# Altium PCB 2020-EE-16 EEW Assignment-8 Rev-1.PcbDoc
Units mm, origin at the board's own origin, x right, y up, seen from the top; angles counter-clockwise.
Board outline 152.4 x 101.6 mm, 2 copper layers (Top Layer, Bottom Layer); 50 components, 37 nets, 154 pads, 26 vias.
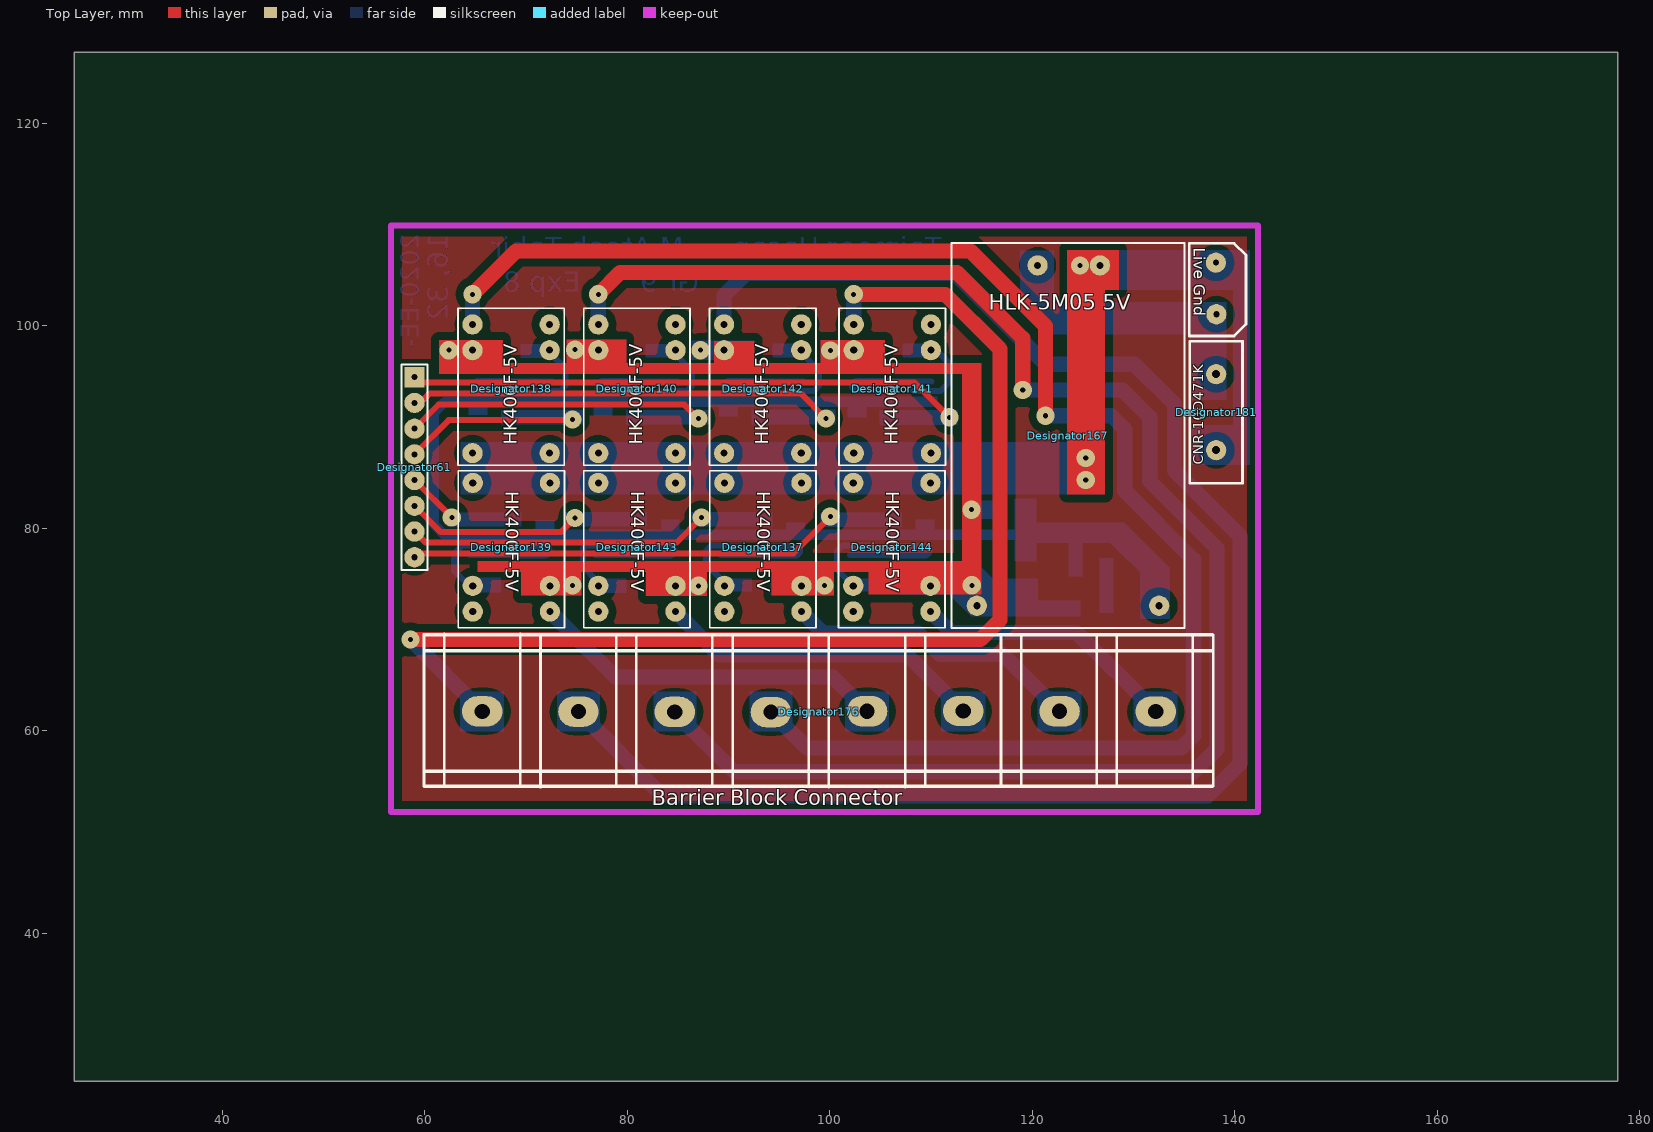
[diagram p0: Top Layer view]
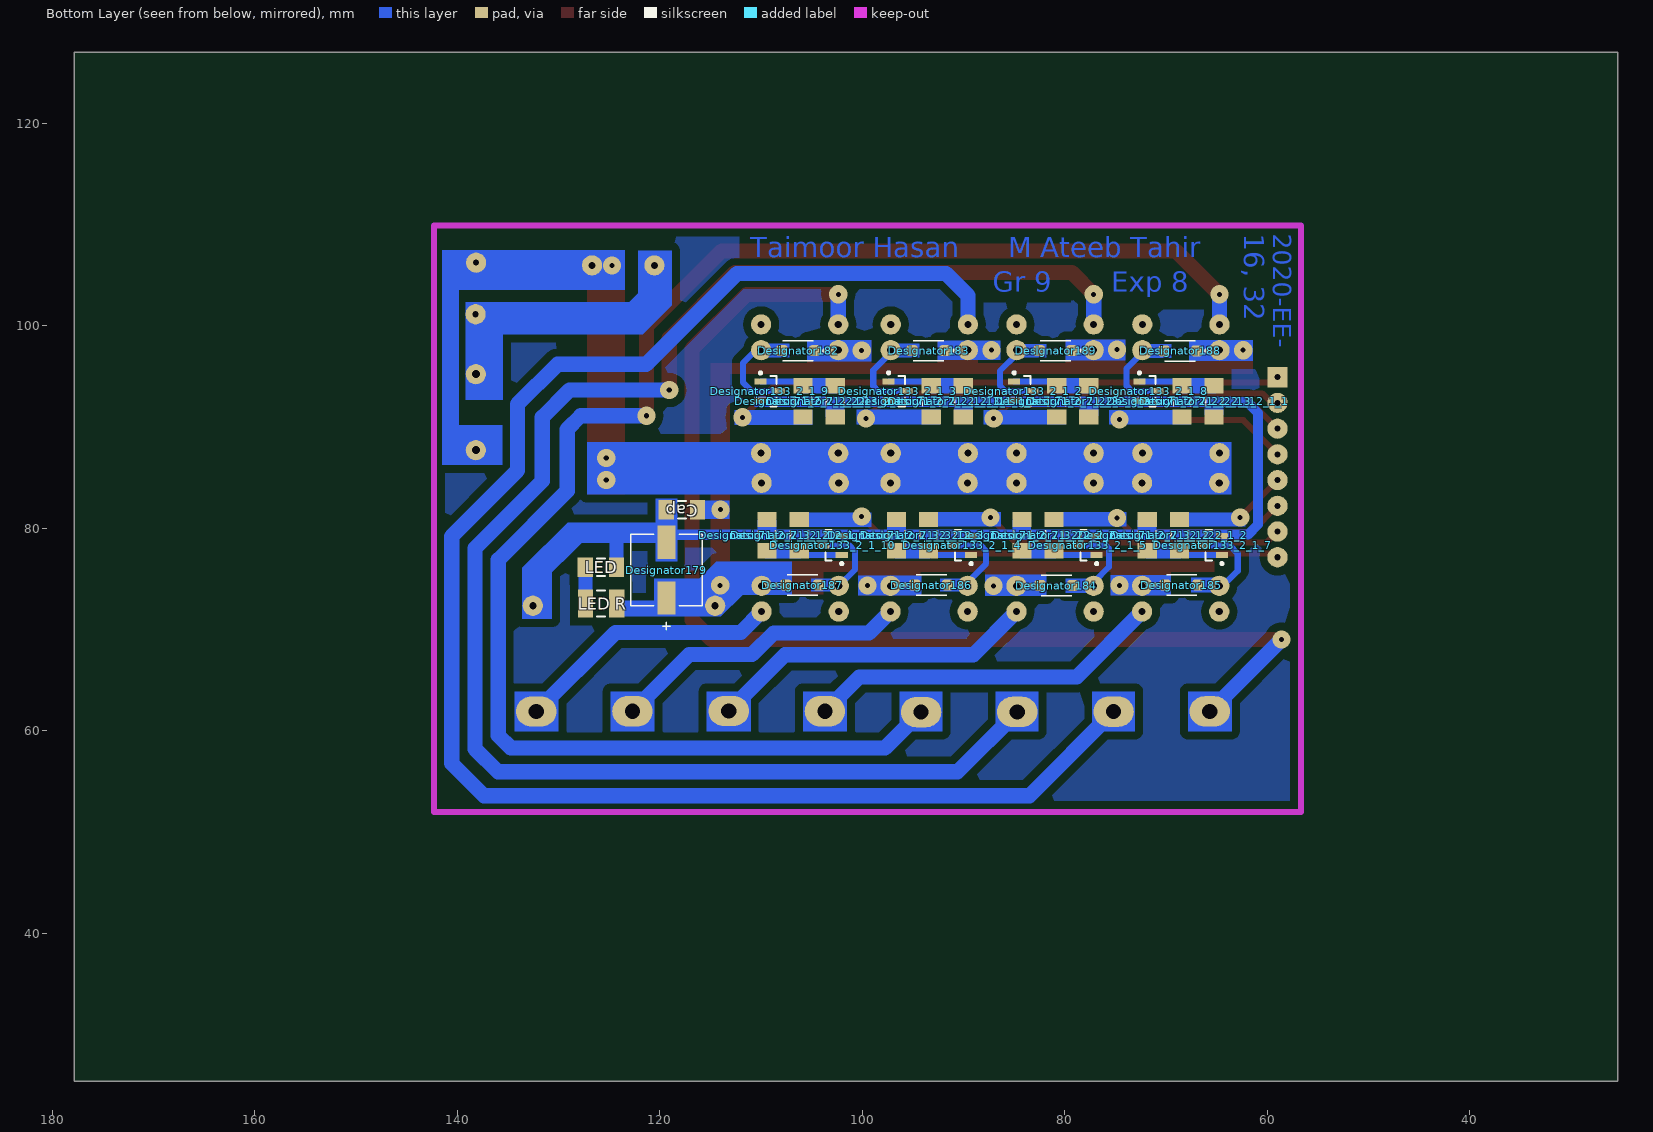
[diagram p1: Bottom Layer view, seen from below]

## Layer stack, top to bottom
Top Layer: signal copper 0.0356
Dielectric: dielectric 0.32, FR-4, Dk 4.8
Bottom Layer: signal copper 0.0356

## Board outline
25.4,25.4 177.8,25.4 177.8,127 25.4,127

## Design rules (kind name [scope] priority, off if disabled: settings)
Clearance [All] p1: gap=0.254
PolygonConnect [All] p1: connectstyle=Relief reliefconductorwidth=0.254 reliefentries=4 polygonreliefangle="90 Angle"
RoutingVias [All] p1: holewidth=0.711 width=1.27 viastyle="Through Hole" minholewidth=0.711 minwidth=1.27 maxholewidth=0.711 maxwidth=1.27
SilkscreenOverComponentPads [All] p1: minsilkscreentomaskgap=0.254
SolderMaskExpansion [All] p1: expansion=0.102
Width [All] p1: maxlimit=1.5 minlimit=0.6 preferedwidth=1.5 minimp=50.000000 maximp=50.000000 favimp=50.000000
27 further rules are at their usual default settings.

## Components (designator, comment, footprint, x,y, rotation, side; value= is the part's Value field where it differs from the comment)
Cap "Comment" RESC3216M 117.805,81.839 r0 bottom
Designator61 "Comment" HDR1X8 58.992,94.92 r270 top
Designator71_2_2_2_1_1 "Comment" RESC3216M 106.223,79.324 r270 bottom
Designator71_2_2_2_1_1_1 "Comment" RESC3216M 93.193,92.532 r90 bottom
Designator71_2_2_2_1_2 "Comment" RESC3216M 68.682,79.324 r270 bottom
Designator71_2_2_2_2 "Comment" RESC3216M 81.051,79.324 r270 bottom
Designator71_2_2_2_2_1 "Comment" RESC3216M 105.842,92.532 r270 bottom
Designator71_2_2_2_2_1_1 "Comment" RESC3216M 68.428,92.532 r90 bottom
Designator71_2_2_2_3 "Comment" RESC3216M 80.797,92.532 r90 bottom
Designator71_2_2_2_3_1 "Comment" RESC3216M 93.447,79.324 r270 bottom
Designator71_2_2_3_1_1 "Comment" RESC3216M 109.398,79.324 r270 bottom
Designator71_2_2_3_1_1_1 "Comment" RESC3216M 90.018,92.532 r90 bottom
Designator71_2_2_3_1_2 "Comment" RESC3216M 71.857,79.324 r270 bottom
Designator71_2_2_3_2 "Comment" RESC3216M 84.226,79.324 r270 bottom
Designator71_2_2_3_2_1 "Comment" RESC3216M 102.667,92.532 r270 bottom
Designator71_2_2_3_2_1_1 "Comment" RESC3216M 65.253,92.532 r90 bottom
Designator71_2_2_3_3 "Comment" RESC3216M 77.622,92.532 r90 bottom
Designator71_2_2_3_3_1 "Comment" RESC3216M 96.622,79.324 r270 bottom
Designator133_2_1_2 "Comment" SOT23-3L 84.099,93.548 r180 bottom
Designator133_2_1_3 "Comment" SOT23-3L 96.495,93.548 r180 bottom
Designator133_2_1_4 "Comment" SOT23-3L 90.145,78.308 r0 bottom
Designator133_2_1_5 "Comment" SOT23-3L 77.749,78.308 r0 bottom
Designator133_2_1_7 "Comment" SOT23-3L 65.38,78.308 r0 bottom
Designator133_2_1_8 "Comment" SOT23-3L 71.73,93.548 r180 bottom
Designator133_2_1_9 "Comment" SOT23-3L 109.144,93.548 r180 bottom
Designator133_2_1_10 "Comment" SOT23-3L 102.921,78.308 r0 bottom
Designator137 "Comment" "HK400F 5v Relay" 93.398,78.13 r270 top
Designator138 "Comment" "HK400F 5v Relay" 68.531,93.777 r90 top
Designator139 "Comment" "HK400F 5v Relay" 68.556,78.13 r270 top
Designator140 "Comment" "HK400F 5v Relay" 80.952,93.777 r90 top
Designator141 "Comment" "HK400F 5v Relay" 106.172,93.777 r90 top
Designator142 "Comment" "HK400F 5v Relay" 93.372,93.777 r90 top
Designator143 "Comment" "HK400F 5v Relay" 80.952,78.13 r270 top
Designator144 "Comment" "HK400F 5v Relay" 106.123,78.13 r270 top
Designator158 "Comment" "100uF silver capacitor" 64.186,94.209 r0 top
Designator167 "Comment" PCBComponent_1 123.52,89.154 r270 top locked
Designator176 "Comment" "Barrier Block Connector" 98.933,61.9 r90 top locked
Designator179 "Comment" PCAP_6.3X5.4-ELECT 119.329,75.87 r90 bottom
Designator181 "Comment" CNR-10D471K 138.151,91.465 r90 top
Designator182 "Comment" SODFL3718X108N 106.324,97.536 r0 bottom
Designator183 "Comment" SODFL3718X108N 93.472,97.536 r0 bottom
Designator184 "Comment" SODFL3718X108N 80.797,74.346 r180 bottom
Designator185 "Comment" SODFL3718X108N 68.453,74.397 r180 bottom
Designator186 "Comment" SODFL3718X108N 93.167,74.397 r180 bottom
Designator187 "Comment" SODFL3718X108N 105.893,74.397 r180 bottom
Designator188 "Comment" SODFL3718X108N 68.605,97.511 r0 bottom
Designator189 "Comment" SODFL3718X108N 80.924,97.536 r0 bottom
LED "Comment" RESC3216M 125.806,76.149 r180 bottom
"LED R" "Comment" RESC3225M 125.781,72.568 r180 bottom
"Live Gnd" "Comment" "PCB Block Connector" 138.151,103.683 r90 top

## Footprints (in the part's own frame and the unit in brackets; to place one, negate y for a bottom-side part, rotate by r counter-clockwise, add the part's x,y. Pads: shape width x height; smd on the part's side, far side on the other; paste and mask are expansions set on the pad)
"100uF silver capacitor" [mm]
  rect 2.8x0.8 smd: 1(-596.389,-761.492) 2(-601.469,-761.492)
  silkscreen extent -602.03,-764.63 -595.81,-758.33
"Barrier Block Connector" [mm] "8 pin Barrier Block Connector"
  oval 3x4 hole 1.5: 1(0.021,33.25) 2(-0.004,23.75) 3(-0.029,14.25) 4(-0.054,4.75) 5(0.033,-4.75) 6(0.054,-14.25) 7(0.029,-23.75) 8(0.004,-33.25)
  silkscreen extent -7.48,-38.92 7.67,39
CNR-10D471K [mm]
  round 2 hole 0.8: 1(-3.75,0) 2(3.75,0)
  silkscreen extent -7,-2.6 7,2.6
HDR1X8 [mm]
  rect 2x2 hole 0.6: 1(0,0)
  round 2 hole 0.6: 2(2.54,0) 3(5.08,0) 4(7.62,0) 5(10.16,0) 6(12.7,0) 7(15.24,0) 8(17.78,0)
  silkscreen extent -1.27,-1.27 19.05,1.27
"HK400F 5v Relay" [mm] "Relay"
  round 2 hole 0.7: Coil-A(3.81,3.81) Coil-B(3.81,-3.81) Comm(-6.35,3.81) Comm(-6.35,-3.81) N-C(6.35,-3.81) N-O(6.35,3.81)
  silkscreen extent -7.55,-5.25 7.95,5.25
PCAP_6.3X5.4-ELECT [mil]
  rect 130x71 smd: 1(-108.5,0) 2(108.5,0)
  silkscreen extent -232,-139 139,139
"PCB Block Connector" [mm]
  round 2 hole 0.6: 1(-2.547,-0.023) 2(2.547,0.023)
  silkscreen extent -4.7,-2.94 4.44,2.65
PCBComponent_1 [mm]
  round 2 hole 0.7: +Vo(16.8,-9) -Vo(16.8,9) "AC LIVE"(-16.8,3.156) "AC NEUTRAL"(-16.8,-3)
  silkscreen extent -19,-11.5 19,11.5
RESC3216M [mm] "Chip Resistor, Body 3.2x1.6mm, IPC Low Density"
  rect 1.5x1.9 smd: 1(-1.55,0) 2(1.55,0)
  silkscreen extent -0.4,-0.85 0.4,0.85, body extent -1.68,-0.87 1.68,0.87, height 0.71
RESC3225M [mm] "Chip Resistor, Body 3.2x2.5mm, IPC Low Density"
  rect 1.5x2.8 smd: 1(-1.55,0) 2(1.55,0)
  silkscreen extent -0.4,-1.3 0.4,1.3, body extent -1.68,-1.32 1.68,1.32, height 0.71
SODFL3718X108N [mm]
  rrect50% 1.12x1.08 smd: A(1.6,0) C(-1.645,0)
  silkscreen extent -2.72,-1 1.5,1
SOT23-3L [mm] "SOT23, 3-Leads, Body 2.9x1.3mm, Pitch 0.95mm, Lead Span 2.5mm, IPC High Density"
  rect 1.2x0.6 smd: 1(-0.9,0.95) 2(-0.9,-0.95) 3(0.9,0)
  silkscreen extent -1.02,-1.5 0.7,1.92, body extent -0.7,-1.5 0.7,1.5, height 1.1

## Via types
v1: diameter 1.8, hole 0.5, Top Layer to Bottom Layer, 26 vias

## Nets (pads, with @x,y where several pads share a name; then routed paths per layer and width w, separated by ;. In a path a pad name is that pad's centre, name@x,y a point inside that pad or via, vN(x,y) a via of type N, cw(c..) or ccw(c..) an arc to the next point about the centre after c; other vN are vias at no path point)
"1-Diode-Coil B": Designator133_2_1_9.3 Designator141.Coil-B Designator182.A | length 8.1
  Bottom Layer w0.6: Designator133_2_1_9.3 110.922,93.548 111.785,94.412 111.785,96.317 110.515,97.587 Designator141.Coil-B
"2-Diode-Coil B": Designator133_2_1_3.3 Designator142.Coil-B Designator183.A | length 7.8
  Bottom Layer w0.6: Designator133_2_1_3.3 98.4,93.548 98.908,94.056 98.908,95.606 97.182,97.331 Designator142.Coil-B
"3-Diode-Coil B": Designator133_2_1_2.3 Designator140.Coil-B Designator189.A | length 7.6
  Bottom Layer w0.6: Designator133_2_1_2.3 85.877,93.548 86.411,94.082 86.411,95.529 84.762,97.179 Designator140.Coil-B
"4-Diode-Coil B": Designator133_2_1_8.3 Designator138.Coil-B Designator188.A | length 7.4
  Bottom Layer w0.6: Designator133_2_1_8.3 73.381,93.548 73.889,94.056 73.889,95.783 72.341,97.331 Designator138.Coil-B
"5-Diode-Coil B": Designator133_2_1_7.3 Designator139.Coil-B Designator185.A | length 7.8
  Bottom Layer w0.6: Designator139.Coil-B 64.389,74.32 62.916,75.794 62.916,77.495 63.729,78.308 Designator133_2_1_7.3
"6-Diode-Coil B": Designator133_2_1_5.3 Designator143.Coil-B Designator184.A | length 7.4
  Bottom Layer w0.6: Designator143.Coil-B 77.142,74.674 75.641,76.175 75.641,77.978 75.971,78.308 Designator133_2_1_5.3
"7-Diode-Coil B": Designator133_2_1_4.3 Designator137.Coil-B Designator186.A | length 8.2
  Bottom Layer w0.6: Designator137.Coil-B@89.052,74.32 Designator137.Coil-B 89.588,74.674 87.757,76.505 87.757,77.749 88.316,78.308 Designator133_2_1_4.3
"8-Diode-Coil B": Designator133_2_1_10.3 Designator144.Coil-B Designator187.A | length 7.4
  Bottom Layer w0.6: Designator144.Coil-B 100.711,75.922 100.711,77.749 101.27,78.308 Designator133_2_1_10.3
"AC Gnd": "Designator167.AC NEUTRAL" "Live Gnd.1" Designator181.2
"AC Live": "Designator167.AC LIVE" "Live Gnd.2" Designator137.Comm Designator138.Comm Designator139.Comm Designator140.Comm Designator141.Comm Designator142.Comm Designator143.Comm Designator144.Comm Designator181.1
  other v1: 125.273,84.76 125.273,86.947 124.714,105.943
"Barrier Conn-1": Designator141.N-O Designator176.1 | length 115.5
  Top Layer w1.5: v1@58.595,69.012 114.884,69.012 116.815,70.942 116.815,97.688 111.404,103.099 v1(102.362,103.099)
  Bottom Layer w1.5: v1(58.595,69.009) Designator176.1 ; Designator141.N-O v1(102.362,103.099)
"Barrier Conn-2": Designator142.N-O Designator176.2 | length 161.9
  Bottom Layer w1.5: Designator176.2 83.484,53.594 137.338,53.594 140.538,56.794 140.538,79.197 134.036,85.7 134.036,92.253 130.099,96.19 121.336,96.19 112.37,105.156 91.719,105.156 89.562,102.999 Designator142.N-O
"Barrier Conn-3": Designator140.N-O Designator176.3 | length 159.7
  Top Layer w1.5: v1(77.142,103.099) 79.301,105.258 112.547,105.258 119.05,98.755 v1(119.05,93.65)
  Bottom Layer w1.5: Designator140.N-O v1@77.142,103.177 ; Designator176.3 90.597,55.956 135.966,55.956 138.227,58.217 138.227,78.029 131.597,84.658 131.597,90.957 128.905,93.65 v1(119.05,93.65)
"Barrier Conn-4": Designator138.N-O Designator176.4 | length 158.4
  Top Layer w1.5: v1(64.721,103.099) 69.014,107.391 113.894,107.391 121.31,99.974 v1(121.31,91.11)
  Bottom Layer w1.5: Designator138.N-O v1(64.721,103.099) ; Designator176.4 97.735,58.293 134.696,58.293 135.941,59.538 135.941,76.886 129.134,83.693 129.134,89.764 127.787,91.11 v1(121.31,91.11)
"Barrier Conn-5": Designator139.N-O Designator176.5 | length 35.4
  Bottom Layer w1.5: Designator139.N-O 78.818,65.329 100.287,65.329 Designator176.5
"Barrier Conn-6": Designator143.N-O Designator176.6 | length 32.5
  Bottom Layer w1.5: Designator143.N-O 89.029,67.513 107.624,67.513 Designator176.6
"Barrier Conn-7": Designator137.N-O Designator176.7 | length 29.6
  Bottom Layer w1.5: Designator137.N-O 99.316,69.672 108.737,69.672 110.871,67.539 117.074,67.539 Designator176.7
"Barrier Conn-8": Designator144.N-O Designator176.8 | length 26.3
  Bottom Layer w1.5: Designator144.N-O 111.99,69.723 124.364,69.723 Designator176.8
"DC Gnd": Cap.2 Designator71_2_2_3_1_1.1 Designator71_2_2_3_1_1_1.1 Designator71_2_2_3_1_2.1 Designator71_2_2_3_2.1 Designator71_2_2_3_2_1.2 Designator71_2_2_3_2_1_1.1 Designator71_2_2_3_3.1 Designator71_2_2_3_3_1.1 Designator133_2_1_2.2 Designator133_2_1_3.2 Designator133_2_1_4.2 Designator133_2_1_5.2 Designator133_2_1_7.2 Designator133_2_1_8.2 Designator133_2_1_9.2 Designator133_2_1_10.2 Designator167.-Vo Designator179.2 LED.2 | length 17.3
  Bottom Layer w1: 63.602,92.481 62.001,92.481 60.909,91.389 60.909,80.366 61.899,79.376 63.628,79.376
"DC Vcc": "LED R.2" Cap.1 Designator137.Coil-A Designator138.Coil-A Designator139.Coil-A Designator140.Coil-A Designator141.Coil-A Designator142.Coil-A Designator143.Coil-A Designator144.Coil-A Designator167.+Vo Designator179.1 Designator182.C Designator183.C Designator184.C Designator185.C Designator186.C Designator187.C Designator188.C Designator189.C
  other v1: 87.046,74.32 99.466,74.346 74.6,74.371 114.021,74.371 113.995,81.839 100.051,97.561 62.382,97.587 87.224,97.587 74.854,97.638
Header-1: Designator61.1 Designator71_2_2_2_2_1.2 | length 54.5
  Top Layer w0.6: Designator61.1 59.5,94.412 108.356,94.412 v1(111.811,90.957)
Header-2: Designator61.2 Designator71_2_2_2_1_1_1.1 | length 42
  Top Layer w0.6: Designator61.2 59.563,92.38 60.503,93.32 97.13,93.32 v1(99.619,90.83)
Header-3: Designator61.3 Designator71_2_2_2_3.1 | length 29.6
  Top Layer w0.6: Designator61.3 61.36,92.208 85.643,92.208 v1(87.02,90.83)
Header-4: Designator61.4 Designator71_2_2_2_2_1_1.1 | length 17
  Top Layer w0.6: Designator61.4 62.37,90.678 v1@74.6,90.678
  other v1: 74.6,90.754
Header-5: Designator61.5 Designator71_2_2_2_1_2.1 | length 5.2
  Top Layer w0.6: Designator61.5 v1(62.675,81.077)
Header-6: Designator61.6 Designator71_2_2_2_2.1 | length 17.5
  Top Layer w0.6: Designator61.6 61.589,79.623 73.451,79.623 v1(74.854,81.026)
Header-7: Designator61.7 Designator71_2_2_2_3_1.1 | length 29.8
  Top Layer w0.6: Designator61.7 60.084,78.588 84.861,78.588 v1(87.325,81.051)
Header-8: Designator61.8 Designator71_2_2_2_1_1.1 | length 42.7
  Top Layer w0.6: Designator61.8 59.373,77.521 96.418,77.521 v1(100.051,81.153)
led: "LED R.1" LED.1
"NPN Base-1": Designator71_2_2_2_2_1.1 Designator71_2_2_3_2_1.1 Designator133_2_1_9.1 | length 10.7
  Bottom Layer w0.6: Designator71_2_2_3_2_1.1 103.083,94.498 Designator133_2_1_9.1
  Bottom Layer w1.5: Designator71_2_2_3_2_1.1 Designator71_2_2_2_2_1.1
"NPN Base-2": Designator71_2_2_2_1_1_1.2 Designator71_2_2_3_1_1_1.2 Designator133_2_1_3.1 | length 10.7
  Bottom Layer w0.6: Designator71_2_2_3_1_1_1.2 90.434,94.498 Designator133_2_1_3.1
  Bottom Layer w1.5: Designator71_2_2_3_1_1_1.2 Designator71_2_2_2_1_1_1.2
"NPN Base-3": Designator71_2_2_2_3.2 Designator71_2_2_3_3.2 Designator133_2_1_2.1 | length 10.7
  Bottom Layer w0.6: Designator71_2_2_3_3.2 78.038,94.498 Designator133_2_1_2.1
  Bottom Layer w1.5: Designator71_2_2_3_3.2 Designator71_2_2_2_3.2
"NPN Base-4": Designator71_2_2_2_2_1_1.2 Designator71_2_2_3_2_1_1.2 Designator133_2_1_8.1 | length 10.7
  Bottom Layer w0.6: Designator71_2_2_3_2_1_1.2 65.669,94.498 Designator133_2_1_8.1
  Bottom Layer w1.5: Designator71_2_2_3_2_1_1.2 Designator71_2_2_2_2_1_1.2
"NPN Base-5": Designator71_2_2_2_1_2.2 Designator71_2_2_3_1_2.2 Designator133_2_1_7.1 | length 14.5
  Bottom Layer w0.6: Designator133_2_1_7.1 Designator71_2_2_3_1_2.2@71.441,77.358 ; 67.655,77.358 Designator71_2_2_3_1_2.2@71.441,77.358 ; Designator71_2_2_3_1_2.2 Designator71_2_2_3_1_2.2@71.441,77.358
  Bottom Layer w1.5: Designator71_2_2_2_1_2.2 Designator71_2_2_3_1_2.2
"NPN Base-6": Designator71_2_2_2_2.2 Designator71_2_2_3_2.2 Designator133_2_1_5.1 | length 14.5
  Bottom Layer w0.6: Designator133_2_1_5.1 Designator71_2_2_3_2.2@83.81,77.358 ; 80.024,77.358 Designator71_2_2_3_2.2@83.81,77.358 ; Designator71_2_2_3_2.2 Designator71_2_2_3_2.2@83.81,77.358
  Bottom Layer w1.5: Designator71_2_2_2_2.2 Designator71_2_2_3_2.2
"NPN Base-7": Designator71_2_2_2_3_1.2 Designator71_2_2_3_3_1.2 Designator133_2_1_4.1 | length 14.5
  Bottom Layer w0.6: Designator133_2_1_4.1 Designator71_2_2_3_3_1.2@96.206,77.358 ; 92.42,77.358 Designator71_2_2_3_3_1.2@96.206,77.358 ; Designator71_2_2_3_3_1.2 Designator71_2_2_3_3_1.2@96.206,77.358
  Bottom Layer w1.5: Designator71_2_2_2_3_1.2 Designator71_2_2_3_3_1.2
"NPN Base-8": Designator71_2_2_2_1_1.2 Designator71_2_2_3_1_1.2 Designator133_2_1_10.1 | length 14.5
  Bottom Layer w0.6: Designator133_2_1_10.1 Designator71_2_2_3_1_1.2@108.982,77.358 ; 105.196,77.358 Designator71_2_2_3_1_1.2@108.982,77.358 ; Designator71_2_2_3_1_1.2 Designator71_2_2_3_1_1.2@108.982,77.358
  Bottom Layer w1.5: Designator71_2_2_2_1_1.2 Designator71_2_2_3_1_1.2
pads on no net: Designator137.N-C Designator138.N-C Designator139.N-C Designator140.N-C Designator141.N-C Designator142.N-C Designator143.N-C Designator144.N-C Designator158.1 Designator158.2

## Polygon pours and split planes (outlines as drawn)
no net on Top Layer "Bottom Layer-No Net" (solid, pour order 2): 56.032,110.363 143.307,110.363 142.926,109.982 142.926,51.74 56.21,51.74 56.032,51.562
no net on Bottom Layer "Bottom Layer-No Net" (solid, pour order 4): 56.21,110.541 56.566,110.185 142.748,110.185 142.748,51.562 56.21,51.562

## Keep-outs
Keep-Out Layer:
  lines w0.6: 56.693,51.968 142.291,51.968 142.291,109.88 56.693,109.88 56.693,51.968

## Other copper
Top Layer:
  rectangle net "DC Vcc": 94.234,73.381 100.432,76.276
  rectangle net "DC Vcc": 81.839,73.33 87.884,76.302
  rectangle net "DC Vcc": 69.494,73.381 75.489,76.251
  rectangle net "DC Vcc": 61.392,95.225 67.742,98.577
  rectangle net "AC Live": 123.444,83.337 127.178,107.442
  region net "DC Vcc": 105.461,98.577 99.085,98.577 99.085,95.225 105.461,95.225
  rectangle net "DC Vcc": 103.835,73.457 113.259,76.759
  rectangle net "DC Vcc": 113.055,73.457 114.986,96.317
  region net "DC Vcc": 92.583,98.501 88.544,98.501 88.544,95.885 92.583,95.885
  region net "DC Vcc": 79.908,98.628 73.99,98.628 73.99,96.037 79.908,96.037
  region net "DC Vcc": 113.69,96.317 65.126,96.317 65.126,95.225 113.69,95.225
  rectangle net "DC Vcc": 65.202,75.667 110.058,76.759
  rectangle net "AC Live": 123.444,103.505 128.549,107.493
Bottom Layer:
  rectangle net "Barrier Conn-4": 92.05,59.944 96.317,63.881
  rectangle net "Barrier Conn-3": 82.575,59.944 86.817,63.881
  rectangle net "Barrier Conn-1": 63.5,59.944 67.843,63.881
  rectangle net "Barrier Conn-2": 73.05,59.944 77.292,63.881
  rectangle net "Barrier Conn-6": 110.998,59.944 115.367,63.881
  rectangle net "Barrier Conn-7": 120.498,59.944 124.841,63.881
  rectangle net "Barrier Conn-8": 129.997,59.944 134.341,63.881
  rectangle net Header-8: 99.085,80.137 107.137,81.559
  rectangle net Header-7: 86.284,80.188 94.336,81.61
  rectangle net Header-6: 73.889,80.162 81.966,81.61
  rectangle net Header-5: 62.154,80.188 69.571,81.559
  rectangle net Header-1: 104.927,90.221 112.624,91.669
  rectangle net Header-2: 92.278,90.272 100.584,91.719
  rectangle net Header-3: 79.858,90.272 88.011,91.669
  rectangle net Header-4: 67.513,90.272 75.616,91.669
  rectangle net "DC Vcc": 106.934,73.406 114.402,76.733
  region net "DC Gnd": 131.877,74.371 133.591,76.086 129.083,80.594 127.368,78.88
  region net "AC Gnd": 121.647,99.143 123.927,101.422 121.069,104.28 118.789,102
  rectangle net "DC Gnd": 119.405,78.562 129.083,80.594
  rectangle net "DC Gnd": 130.607,71.044 133.591,76.086
  rectangle net "DC Gnd": 118.262,76.733 120.396,82.931
  region net "DC Gnd": 124.968,75.26 124.968,79.553 123.546,79.553 123.546,75.26
  rectangle net led: 126.644,71.653 128.016,77.064
  rectangle net "DC Vcc": 113.944,71.272 120.574,75.057
  rectangle net "DC Vcc": 113.106,80.924 116.764,82.728
  rectangle net "AC Gnd": 118.789,102 122.149,107.442
  rectangle net "AC Gnd": 121.647,99.143 139.167,102.343
  rectangle net "AC Live": 135.534,86.233 141.249,90.221
  rectangle net "AC Live": 139.802,86.233 141.503,107.493
  rectangle net "AC Live": 123.444,103.505 141.249,107.493
  rectangle net "AC Gnd": 135.484,92.659 139.167,102.26
  region net "DC Gnd": 72.796,80.797 70.917,80.797 70.917,79.502 72.796,79.502
  region net "DC Gnd": 85.166,80.848 83.312,80.848 83.312,79.654 85.166,79.654
  region net "DC Gnd": 97.561,80.594 95.682,80.594 95.682,79.781 97.561,79.781
  region net "DC Gnd": 110.33,80.874 108.451,80.874 108.451,79.585 110.33,79.585
  region net "DC Gnd": 103.632,92.405 101.727,92.405 101.727,90.932 103.632,90.932
  region net "DC Gnd": 90.957,92.608 89.078,92.608 89.078,91.059 90.957,91.059
  region net "DC Gnd": 78.562,92.583 76.683,92.583 76.683,91.11 78.562,91.11
  region net "DC Gnd": 66.192,92.993 64.313,92.993 64.313,91.186 66.192,91.186
  region net "DC Gnd": 110.642,92.989 63.608,92.989 63.608,91.993 110.642,91.993
  region net "DC Gnd": 119.101,79.858 63.608,79.858 63.608,78.867 119.101,78.867
  region net "4-Diode-Coil B": 72.898,98.196 69.469,98.196 69.469,96.825 72.898,96.825
  region net "3-Diode-Coil B": 85.217,98.196 81.813,98.196 81.813,96.876 85.217,96.876
  region net "2-Diode-Coil B": 97.587,98.222 94.336,98.222 94.336,96.876 97.587,96.876
  region net "1-Diode-Coil B": 110.261,98.222 107.188,98.222 107.188,96.876 110.261,96.876
  region net "8-Diode-Coil B": 105.054,75.057 101.6,75.057 101.6,73.762 105.054,73.762
  region net "7-Diode-Coil B": 92.304,75.057 89.052,75.057 89.052,73.736 92.304,73.736
  region net "6-Diode-Coil B": 79.934,75.057 76.657,75.057 76.657,73.609 79.934,73.609
  region net "5-Diode-Coil B": 67.539,75.159 64.389,75.159 64.389,73.66 67.539,73.66
  region net "DC Vcc": 79.934,98.628 73.99,98.628 73.99,96.545 79.934,96.545
  region net "DC Vcc": 92.583,98.527 86.36,98.527 86.36,96.596 92.583,96.596
  region net "DC Vcc": 105.461,98.577 99.085,98.577 99.085,96.469 105.461,96.469
  region net "DC Vcc": 75.489,75.387 69.494,75.387 69.494,73.355 75.489,73.355
  region net "DC Vcc": 87.884,75.438 81.788,75.438 81.788,73.304 87.884,73.304
  region net "DC Vcc": 100.432,75.362 94.158,75.362 94.158,73.381 100.432,73.381
  rectangle net "AC Live": 63.551,83.337 127.178,88.519
  rectangle net "Barrier Conn-5": 101.498,59.944 105.867,63.881
  region net "DC Vcc": 114.973,73.8 116.154,74.981 114.402,76.733 113.221,75.552
  region net "DC Vcc": 113.944,71.272 115.125,72.453 112.954,74.625 111.773,73.444
  rectangle net "DC Vcc": 119.405,71.272 124.765,72.847
  region net "DC Vcc": 67.742,98.577 61.392,98.577 61.392,96.495 67.742,96.495
  text "2020-EE-" at 59.411,109.093 h1.8 r90
  text "16, 32" at 62.281,109.093 h2 r90
  text "M Ateeb Tahir" at 85.573,106.756 h2
  text "Taimoor Hasan" at 111.049,106.756 h2
  text "Exp 8" at 75.413,103.353 h2
  text "Gr 9" at 87.097,103.353 h2

## Silkscreen, mask and mechanical layers (free items; w line width, h text height)
Top Overlay:
  text "Barrier Block Connector" at 82.423,52.629 h1.52

## Text inside footprints (layer, text, board x,y; h text height)
Designator137: Top Overlay "HK400F-5V" at 92.849,83.652 h1.3 r270
Designator138: Top Overlay "HK400F-5V" at 69.08,88.256 h1.3 r90
Designator139: Top Overlay "HK400F-5V" at 68.008,83.652 h1.3 r270
Designator140: Top Overlay "HK400F-5V" at 81.5,88.256 h1.3 r90
Designator141: Top Overlay "HK400F-5V" at 106.721,88.256 h1.3 r90
Designator142: Top Overlay "HK400F-5V" at 93.921,88.256 h1.3 r90
Designator143: Top Overlay "HK400F-5V" at 80.403,83.652 h1.3 r270
Designator144: Top Overlay "HK400F-5V" at 105.574,83.652 h1.3 r270
Designator167: Top Overlay "HLK-5M05 5V" at 115.697,101.6 h1.52
Designator181: Top Overlay "CNR-10D471K" at 136.881,86.258 h1 r90